# EAGLE board Opto_Isolator_Breakout_Panel_v10 (EAGLE 7.2.0), part 1 of 3
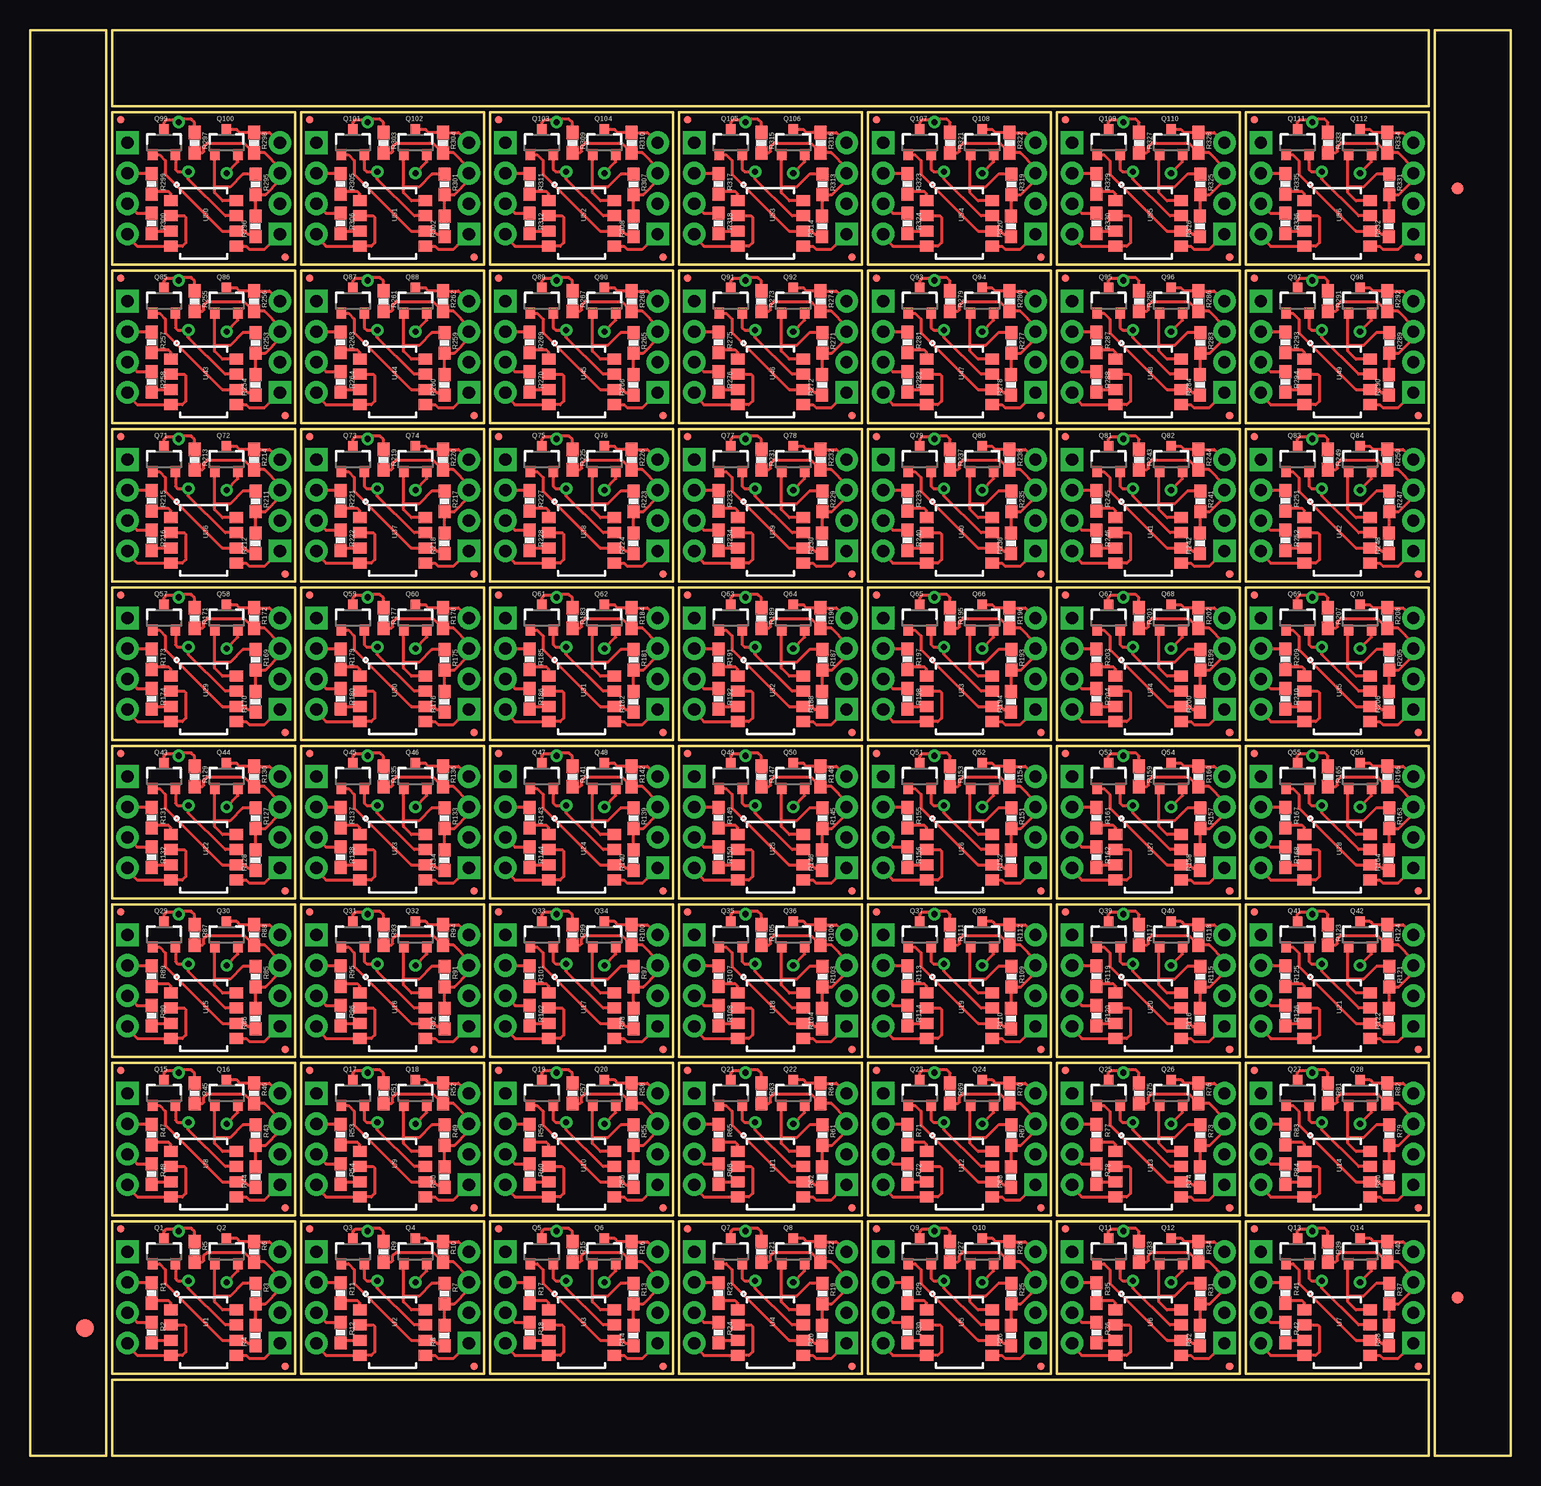
[diagram p0: board, top side]
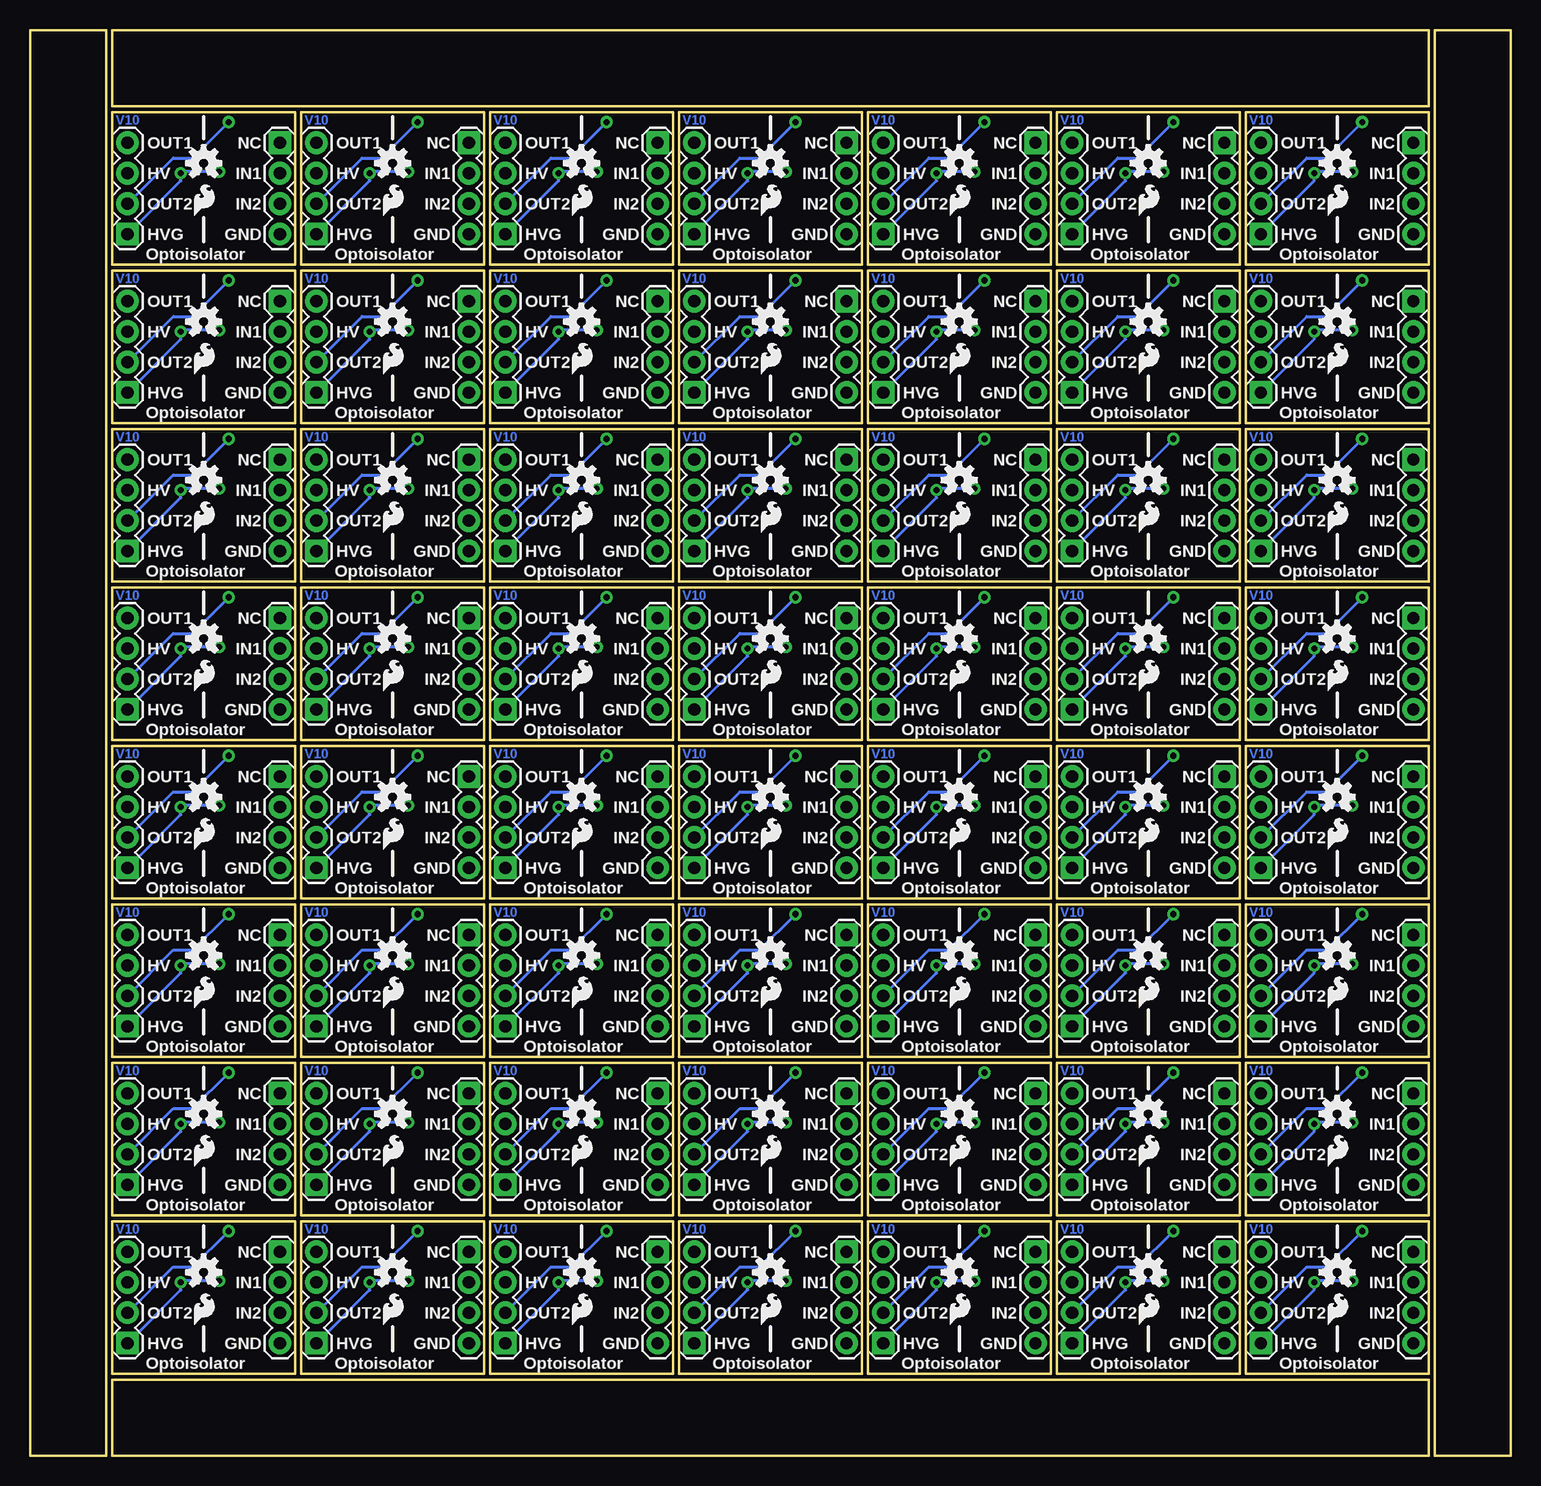
[diagram p1: board, bottom side, seen from below]

Size 123.44 x 118.87 mm. Coordinates in mm from the lower left corner, seen from the top.
Outline: 240 segments
Copper layers (1*16): Top 0.035mm / dielectric 1.5mm / Bottom 0.035mm
Design rules "SparkFun-2-layer": minimum track width 7mil, minimum drill 15mil, track to track 8mil, track to pad 8mil, pad to pad 8mil, via to via 8mil, smd to smd 8mil, copper to edge 8mil, drill to drill 8mil, minimum pad ring 12mil, minimum via ring 10mil, stop-mask expansion 4mil, vias tented up to drill 20mil, thermal gap 10mil

## Footprints (pad centres in the part's own frame; a part is rotated, then mirrored left to right if it is on the bottom)
FIDUCIAL-1.5X3 = smd 1.5 x 1.5: 1 0,0
FIDUCIAL-1X2 = smd 1 x 1: 1 0,0
1X04 = drill 1.016 pad 1.88 square: 1 0,0 | drill 1.016 pad 1.88: 2 2.54,0; 3 5.08,0; 4 7.62,0
SOT23-3 = smd 0.8 x 0.9: 1 -0.95,-1; 2 0.95,-1; 3 0,1.1
0603-RES = smd 1.1 x 1: 1 -0.85,0; 2 0.85,0
SO08-2 = smd 0.914 x 1.143: 1 -1.905,-2.731; 2 -0.635,-2.731; 3 0.635,-2.731; 4 1.905,-2.731; 5 1.905,2.731; 6 0.635,2.731; 7 -0.635,2.731; 8 -1.905,2.731
MICRO-FIDUCIAL = smd 0.635 x 0.635: 1 0,0

## Placement (x,y rotation side)
E$1  [FIDUCIAL-1.5X3]  4.57,10.67 0 top
E$4  [FIDUCIAL-1X2]  119,13.21 0 top
E$5  [FIDUCIAL-1X2]  119,105.66 180 top
JP1  [1X04]  20.83,9.4 90 bottom
JP2  [1X04]  8.13,17.02 270 bottom
JP3  [1X04]  36.58,9.4 90 bottom
JP4  [1X04]  23.88,17.02 270 bottom
JP5  [1X04]  52.32,9.4 90 bottom
JP6  [1X04]  39.62,17.02 270 bottom
JP7  [1X04]  68.07,9.4 90 bottom
JP8  [1X04]  55.37,17.02 270 bottom
JP9  [1X04]  83.82,9.4 90 bottom
JP10  [1X04]  71.12,17.02 270 bottom
JP11  [1X04]  99.57,9.4 90 bottom
JP12  [1X04]  86.87,17.02 270 bottom
JP13  [1X04]  115.32,9.4 90 bottom
JP14  [1X04]  102.62,17.02 270 bottom
JP15  [1X04]  20.83,22.61 90 bottom
JP16  [1X04]  8.13,30.23 270 bottom
JP17  [1X04]  36.58,22.61 90 bottom
JP18  [1X04]  23.88,30.23 270 bottom
JP19  [1X04]  52.32,22.61 90 bottom
JP20  [1X04]  39.62,30.23 270 bottom
JP21  [1X04]  68.07,22.61 90 bottom
JP22  [1X04]  55.37,30.23 270 bottom
JP23  [1X04]  83.82,22.61 90 bottom
JP24  [1X04]  71.12,30.23 270 bottom
JP25  [1X04]  99.57,22.61 90 bottom
JP26  [1X04]  86.87,30.23 270 bottom
JP27  [1X04]  115.32,22.61 90 bottom
JP28  [1X04]  102.62,30.23 270 bottom
JP29  [1X04]  20.83,35.81 90 bottom
JP30  [1X04]  8.13,43.43 270 bottom
JP31  [1X04]  36.58,35.81 90 bottom
JP32  [1X04]  23.88,43.43 270 bottom
JP33  [1X04]  52.32,35.81 90 bottom
JP34  [1X04]  39.62,43.43 270 bottom
JP35  [1X04]  68.07,35.81 90 bottom
JP36  [1X04]  55.37,43.43 270 bottom
JP37  [1X04]  83.82,35.81 90 bottom
JP38  [1X04]  71.12,43.43 270 bottom
JP39  [1X04]  99.57,35.81 90 bottom
JP40  [1X04]  86.87,43.43 270 bottom
JP41  [1X04]  115.32,35.81 90 bottom
JP42  [1X04]  102.62,43.43 270 bottom
JP43  [1X04]  20.83,49.02 90 bottom
JP44  [1X04]  8.13,56.64 270 bottom
JP45  [1X04]  36.58,49.02 90 bottom
JP46  [1X04]  23.88,56.64 270 bottom
JP47  [1X04]  52.32,49.02 90 bottom
JP48  [1X04]  39.62,56.64 270 bottom
JP49  [1X04]  68.07,49.02 90 bottom
JP50  [1X04]  55.37,56.64 270 bottom
JP51  [1X04]  83.82,49.02 90 bottom
JP52  [1X04]  71.12,56.64 270 bottom
JP53  [1X04]  99.57,49.02 90 bottom
JP54  [1X04]  86.87,56.64 270 bottom
JP55  [1X04]  115.32,49.02 90 bottom
JP56  [1X04]  102.62,56.64 270 bottom
JP57  [1X04]  20.83,62.23 90 bottom
JP58  [1X04]  8.13,69.85 270 bottom
JP59  [1X04]  36.58,62.23 90 bottom
JP60  [1X04]  23.88,69.85 270 bottom
JP61  [1X04]  52.32,62.23 90 bottom
JP62  [1X04]  39.62,69.85 270 bottom
JP63  [1X04]  68.07,62.23 90 bottom
JP64  [1X04]  55.37,69.85 270 bottom
JP65  [1X04]  83.82,62.23 90 bottom
JP66  [1X04]  71.12,69.85 270 bottom
JP67  [1X04]  99.57,62.23 90 bottom
JP68  [1X04]  86.87,69.85 270 bottom
JP69  [1X04]  115.32,62.23 90 bottom
JP70  [1X04]  102.62,69.85 270 bottom
JP71  [1X04]  20.83,75.44 90 bottom
JP72  [1X04]  8.13,83.06 270 bottom
JP73  [1X04]  36.58,75.44 90 bottom
JP74  [1X04]  23.88,83.06 270 bottom
JP75  [1X04]  52.32,75.44 90 bottom
JP76  [1X04]  39.62,83.06 270 bottom
JP77  [1X04]  68.07,75.44 90 bottom
JP78  [1X04]  55.37,83.06 270 bottom
JP79  [1X04]  83.82,75.44 90 bottom
JP80  [1X04]  71.12,83.06 270 bottom
JP81  [1X04]  99.57,75.44 90 bottom
JP82  [1X04]  86.87,83.06 270 bottom
JP83  [1X04]  115.32,75.44 90 bottom
JP84  [1X04]  102.62,83.06 270 bottom
JP85  [1X04]  20.83,88.65 90 bottom
JP86  [1X04]  8.13,96.27 270 bottom
JP87  [1X04]  36.58,88.65 90 bottom
JP88  [1X04]  23.88,96.27 270 bottom
JP89  [1X04]  52.32,88.65 90 bottom
JP90  [1X04]  39.62,96.27 270 bottom
JP91  [1X04]  68.07,88.65 90 bottom
JP92  [1X04]  55.37,96.27 270 bottom
JP93  [1X04]  83.82,88.65 90 bottom
JP94  [1X04]  71.12,96.27 270 bottom
JP95  [1X04]  99.57,88.65 90 bottom
JP96  [1X04]  86.87,96.27 270 bottom
JP97  [1X04]  115.32,88.65 90 bottom
JP98  [1X04]  102.62,96.27 270 bottom
JP99  [1X04]  20.83,101.85 90 bottom
JP100  [1X04]  8.13,109.47 270 bottom
JP101  [1X04]  36.58,101.85 90 bottom
JP102  [1X04]  23.88,109.47 270 bottom
JP103  [1X04]  52.32,101.85 90 bottom
JP104  [1X04]  39.62,109.47 270 bottom
JP105  [1X04]  68.07,101.85 90 bottom
JP106  [1X04]  55.37,109.47 270 bottom
JP107  [1X04]  83.82,101.85 90 bottom
JP108  [1X04]  71.12,109.47 270 bottom
JP109  [1X04]  99.57,101.85 90 bottom
JP110  [1X04]  86.87,109.47 270 bottom
JP111  [1X04]  115.32,101.85 90 bottom
JP112  [1X04]  102.62,109.47 270 bottom
LOGO1  OSHW-LOGOS  [OSHW-LOGO-S]  14.48,15.31 0 bottom
LOGO2  SFE_LOGO_FLAME.1_INCH  [SFE_LOGO_FLAME_.1]  15.57,10.61 0 bottom
LOGO3  SFE_LOGO_FLAME.1_INCH  [SFE_LOGO_FLAME_.1]  31.32,10.61 0 bottom
LOGO4  OSHW-LOGOS  [OSHW-LOGO-S]  30.23,15.31 0 bottom
LOGO5  SFE_LOGO_FLAME.1_INCH  [SFE_LOGO_FLAME_.1]  47.06,10.61 0 bottom
LOGO6  OSHW-LOGOS  [OSHW-LOGO-S]  45.98,15.31 0 bottom
LOGO7  SFE_LOGO_FLAME.1_INCH  [SFE_LOGO_FLAME_.1]  62.81,10.61 0 bottom
LOGO8  OSHW-LOGOS  [OSHW-LOGO-S]  61.73,15.31 0 bottom
LOGO9  SFE_LOGO_FLAME.1_INCH  [SFE_LOGO_FLAME_.1]  78.56,10.61 0 bottom
LOGO10  OSHW-LOGOS  [OSHW-LOGO-S]  77.47,15.31 0 bottom
LOGO11  SFE_LOGO_FLAME.1_INCH  [SFE_LOGO_FLAME_.1]  94.31,10.61 0 bottom
LOGO12  OSHW-LOGOS  [OSHW-LOGO-S]  93.22,15.31 0 bottom
LOGO13  SFE_LOGO_FLAME.1_INCH  [SFE_LOGO_FLAME_.1]  110.06,10.61 0 bottom
LOGO14  OSHW-LOGOS  [OSHW-LOGO-S]  108.97,15.31 0 bottom
LOGO15  SFE_LOGO_FLAME.1_INCH  [SFE_LOGO_FLAME_.1]  15.57,23.82 0 bottom
LOGO16  OSHW-LOGOS  [OSHW-LOGO-S]  14.48,28.52 0 bottom
LOGO17  SFE_LOGO_FLAME.1_INCH  [SFE_LOGO_FLAME_.1]  31.32,23.82 0 bottom
LOGO18  OSHW-LOGOS  [OSHW-LOGO-S]  30.23,28.52 0 bottom
LOGO19  SFE_LOGO_FLAME.1_INCH  [SFE_LOGO_FLAME_.1]  47.06,23.82 0 bottom
LOGO20  OSHW-LOGOS  [OSHW-LOGO-S]  45.98,28.52 0 bottom
LOGO21  SFE_LOGO_FLAME.1_INCH  [SFE_LOGO_FLAME_.1]  62.81,23.82 0 bottom
LOGO22  OSHW-LOGOS  [OSHW-LOGO-S]  61.73,28.52 0 bottom
LOGO23  SFE_LOGO_FLAME.1_INCH  [SFE_LOGO_FLAME_.1]  78.56,23.82 0 bottom
LOGO24  OSHW-LOGOS  [OSHW-LOGO-S]  77.47,28.52 0 bottom
LOGO25  SFE_LOGO_FLAME.1_INCH  [SFE_LOGO_FLAME_.1]  94.31,23.82 0 bottom
LOGO26  OSHW-LOGOS  [OSHW-LOGO-S]  93.22,28.52 0 bottom
LOGO27  SFE_LOGO_FLAME.1_INCH  [SFE_LOGO_FLAME_.1]  110.06,23.82 0 bottom
LOGO28  OSHW-LOGOS  [OSHW-LOGO-S]  108.97,28.52 0 bottom
LOGO29  SFE_LOGO_FLAME.1_INCH  [SFE_LOGO_FLAME_.1]  15.57,37.02 0 bottom
LOGO30  OSHW-LOGOS  [OSHW-LOGO-S]  14.48,41.73 0 bottom
LOGO31  SFE_LOGO_FLAME.1_INCH  [SFE_LOGO_FLAME_.1]  31.32,37.02 0 bottom
LOGO32  OSHW-LOGOS  [OSHW-LOGO-S]  30.23,41.73 0 bottom
LOGO33  SFE_LOGO_FLAME.1_INCH  [SFE_LOGO_FLAME_.1]  47.06,37.02 0 bottom
LOGO34  OSHW-LOGOS  [OSHW-LOGO-S]  45.98,41.73 0 bottom
LOGO35  SFE_LOGO_FLAME.1_INCH  [SFE_LOGO_FLAME_.1]  62.81,37.02 0 bottom
LOGO36  OSHW-LOGOS  [OSHW-LOGO-S]  61.73,41.73 0 bottom
LOGO37  SFE_LOGO_FLAME.1_INCH  [SFE_LOGO_FLAME_.1]  78.56,37.02 0 bottom
LOGO38  OSHW-LOGOS  [OSHW-LOGO-S]  77.47,41.73 0 bottom
LOGO39  SFE_LOGO_FLAME.1_INCH  [SFE_LOGO_FLAME_.1]  94.31,37.02 0 bottom
LOGO40  OSHW-LOGOS  [OSHW-LOGO-S]  93.22,41.73 0 bottom
LOGO41  SFE_LOGO_FLAME.1_INCH  [SFE_LOGO_FLAME_.1]  110.06,37.02 0 bottom
LOGO42  OSHW-LOGOS  [OSHW-LOGO-S]  108.97,41.73 0 bottom
LOGO43  SFE_LOGO_FLAME.1_INCH  [SFE_LOGO_FLAME_.1]  15.57,50.23 0 bottom
LOGO44  OSHW-LOGOS  [OSHW-LOGO-S]  14.48,54.93 0 bottom
LOGO45  SFE_LOGO_FLAME.1_INCH  [SFE_LOGO_FLAME_.1]  31.32,50.23 0 bottom
LOGO46  OSHW-LOGOS  [OSHW-LOGO-S]  30.23,54.93 0 bottom
LOGO47  SFE_LOGO_FLAME.1_INCH  [SFE_LOGO_FLAME_.1]  47.06,50.23 0 bottom
LOGO48  OSHW-LOGOS  [OSHW-LOGO-S]  45.98,54.93 0 bottom
LOGO49  SFE_LOGO_FLAME.1_INCH  [SFE_LOGO_FLAME_.1]  62.81,50.23 0 bottom
LOGO50  OSHW-LOGOS  [OSHW-LOGO-S]  61.73,54.93 0 bottom
LOGO51  SFE_LOGO_FLAME.1_INCH  [SFE_LOGO_FLAME_.1]  78.56,50.23 0 bottom
LOGO52  OSHW-LOGOS  [OSHW-LOGO-S]  77.47,54.93 0 bottom
LOGO53  SFE_LOGO_FLAME.1_INCH  [SFE_LOGO_FLAME_.1]  94.31,50.23 0 bottom
LOGO54  OSHW-LOGOS  [OSHW-LOGO-S]  93.22,54.93 0 bottom
LOGO55  SFE_LOGO_FLAME.1_INCH  [SFE_LOGO_FLAME_.1]  110.06,50.23 0 bottom
LOGO56  OSHW-LOGOS  [OSHW-LOGO-S]  108.97,54.93 0 bottom
LOGO57  SFE_LOGO_FLAME.1_INCH  [SFE_LOGO_FLAME_.1]  15.57,63.44 0 bottom
LOGO58  OSHW-LOGOS  [OSHW-LOGO-S]  14.48,68.14 0 bottom
LOGO59  SFE_LOGO_FLAME.1_INCH  [SFE_LOGO_FLAME_.1]  31.32,63.44 0 bottom
LOGO60  OSHW-LOGOS  [OSHW-LOGO-S]  30.23,68.14 0 bottom
LOGO61  SFE_LOGO_FLAME.1_INCH  [SFE_LOGO_FLAME_.1]  47.06,63.44 0 bottom
LOGO62  OSHW-LOGOS  [OSHW-LOGO-S]  45.98,68.14 0 bottom
LOGO63  SFE_LOGO_FLAME.1_INCH  [SFE_LOGO_FLAME_.1]  62.81,63.44 0 bottom
LOGO64  OSHW-LOGOS  [OSHW-LOGO-S]  61.73,68.14 0 bottom
LOGO65  SFE_LOGO_FLAME.1_INCH  [SFE_LOGO_FLAME_.1]  78.56,63.44 0 bottom
LOGO66  OSHW-LOGOS  [OSHW-LOGO-S]  77.47,68.14 0 bottom
LOGO67  SFE_LOGO_FLAME.1_INCH  [SFE_LOGO_FLAME_.1]  94.31,63.44 0 bottom
LOGO68  OSHW-LOGOS  [OSHW-LOGO-S]  93.22,68.14 0 bottom
LOGO69  SFE_LOGO_FLAME.1_INCH  [SFE_LOGO_FLAME_.1]  110.06,63.44 0 bottom
LOGO70  OSHW-LOGOS  [OSHW-LOGO-S]  108.97,68.14 0 bottom
LOGO71  SFE_LOGO_FLAME.1_INCH  [SFE_LOGO_FLAME_.1]  15.57,76.65 0 bottom
LOGO72  OSHW-LOGOS  [OSHW-LOGO-S]  14.48,81.35 0 bottom
LOGO73  SFE_LOGO_FLAME.1_INCH  [SFE_LOGO_FLAME_.1]  31.32,76.65 0 bottom
LOGO74  OSHW-LOGOS  [OSHW-LOGO-S]  30.23,81.35 0 bottom
LOGO75  SFE_LOGO_FLAME.1_INCH  [SFE_LOGO_FLAME_.1]  47.06,76.65 0 bottom
LOGO76  OSHW-LOGOS  [OSHW-LOGO-S]  45.98,81.35 0 bottom
LOGO77  SFE_LOGO_FLAME.1_INCH  [SFE_LOGO_FLAME_.1]  62.81,76.65 0 bottom
LOGO78  OSHW-LOGOS  [OSHW-LOGO-S]  61.73,81.35 0 bottom
LOGO79  SFE_LOGO_FLAME.1_INCH  [SFE_LOGO_FLAME_.1]  78.56,76.65 0 bottom
LOGO80  OSHW-LOGOS  [OSHW-LOGO-S]  77.47,81.35 0 bottom
LOGO81  SFE_LOGO_FLAME.1_INCH  [SFE_LOGO_FLAME_.1]  94.31,76.65 0 bottom
LOGO82  OSHW-LOGOS  [OSHW-LOGO-S]  93.22,81.35 0 bottom
LOGO83  SFE_LOGO_FLAME.1_INCH  [SFE_LOGO_FLAME_.1]  110.06,76.65 0 bottom
LOGO84  OSHW-LOGOS  [OSHW-LOGO-S]  108.97,81.35 0 bottom
LOGO85  SFE_LOGO_FLAME.1_INCH  [SFE_LOGO_FLAME_.1]  15.57,89.86 0 bottom
LOGO86  OSHW-LOGOS  [OSHW-LOGO-S]  14.48,94.56 0 bottom
LOGO87  SFE_LOGO_FLAME.1_INCH  [SFE_LOGO_FLAME_.1]  31.32,89.86 0 bottom
LOGO88  OSHW-LOGOS  [OSHW-LOGO-S]  30.23,94.56 0 bottom
LOGO89  SFE_LOGO_FLAME.1_INCH  [SFE_LOGO_FLAME_.1]  47.06,89.86 0 bottom
LOGO90  OSHW-LOGOS  [OSHW-LOGO-S]  45.98,94.56 0 bottom
LOGO91  SFE_LOGO_FLAME.1_INCH  [SFE_LOGO_FLAME_.1]  62.81,89.86 0 bottom
LOGO92  OSHW-LOGOS  [OSHW-LOGO-S]  61.73,94.56 0 bottom
LOGO93  SFE_LOGO_FLAME.1_INCH  [SFE_LOGO_FLAME_.1]  78.56,89.86 0 bottom
LOGO94  OSHW-LOGOS  [OSHW-LOGO-S]  77.47,94.56 0 bottom
LOGO95  SFE_LOGO_FLAME.1_INCH  [SFE_LOGO_FLAME_.1]  94.31,89.86 0 bottom
LOGO96  OSHW-LOGOS  [OSHW-LOGO-S]  93.22,94.56 0 bottom
LOGO97  SFE_LOGO_FLAME.1_INCH  [SFE_LOGO_FLAME_.1]  110.06,89.86 0 bottom
LOGO98  OSHW-LOGOS  [OSHW-LOGO-S]  108.97,94.56 0 bottom
LOGO99  SFE_LOGO_FLAME.1_INCH  [SFE_LOGO_FLAME_.1]  15.57,103.06 0 bottom
LOGO100  OSHW-LOGOS  [OSHW-LOGO-S]  14.48,107.77 0 bottom
LOGO101  SFE_LOGO_FLAME.1_INCH  [SFE_LOGO_FLAME_.1]  31.32,103.06 0 bottom
LOGO102  OSHW-LOGOS  [OSHW-LOGO-S]  30.23,107.77 0 bottom
LOGO103  SFE_LOGO_FLAME.1_INCH  [SFE_LOGO_FLAME_.1]  47.06,103.06 0 bottom
LOGO104  OSHW-LOGOS  [OSHW-LOGO-S]  45.98,107.77 0 bottom
LOGO105  SFE_LOGO_FLAME.1_INCH  [SFE_LOGO_FLAME_.1]  62.81,103.06 0 bottom
LOGO106  OSHW-LOGOS  [OSHW-LOGO-S]  61.73,107.77 0 bottom
LOGO107  SFE_LOGO_FLAME.1_INCH  [SFE_LOGO_FLAME_.1]  78.56,103.06 0 bottom
LOGO108  OSHW-LOGOS  [OSHW-LOGO-S]  77.47,107.77 0 bottom
LOGO109  SFE_LOGO_FLAME.1_INCH  [SFE_LOGO_FLAME_.1]  94.31,103.06 0 bottom
LOGO110  OSHW-LOGOS  [OSHW-LOGO-S]  93.22,107.77 0 bottom
LOGO111  SFE_LOGO_FLAME.1_INCH  [SFE_LOGO_FLAME_.1]  110.06,103.06 0 bottom
LOGO112  OSHW-LOGOS  [OSHW-LOGO-S]  108.97,107.77 0 bottom
Q1  NPN  [SOT23-3]  11.18,17.02 0 top
Q2  NPN  [SOT23-3]  16.38,17.02 0 top
Q3  NPN  [SOT23-3]  26.92,17.02 0 top
Q4  NPN  [SOT23-3]  32.13,17.02 0 top
Q5  NPN  [SOT23-3]  42.67,17.02 0 top
Q6  NPN  [SOT23-3]  47.88,17.02 0 top
Q7  NPN  [SOT23-3]  58.42,17.02 0 top
Q8  NPN  [SOT23-3]  63.63,17.02 0 top
Q9  NPN  [SOT23-3]  74.17,17.02 0 top
Q10  NPN  [SOT23-3]  79.38,17.02 0 top
Q11  NPN  [SOT23-3]  89.92,17.02 0 top
Q12  NPN  [SOT23-3]  95.12,17.02 0 top
Q13  NPN  [SOT23-3]  105.66,17.02 0 top
Q14  NPN  [SOT23-3]  110.87,17.02 0 top
Q15  NPN  [SOT23-3]  11.18,30.23 0 top
Q16  NPN  [SOT23-3]  16.38,30.23 0 top
Q17  NPN  [SOT23-3]  26.92,30.23 0 top
Q18  NPN  [SOT23-3]  32.13,30.23 0 top
Q19  NPN  [SOT23-3]  42.67,30.23 0 top
Q20  NPN  [SOT23-3]  47.88,30.23 0 top
Q21  NPN  [SOT23-3]  58.42,30.23 0 top
Q22  NPN  [SOT23-3]  63.63,30.23 0 top
Q23  NPN  [SOT23-3]  74.17,30.23 0 top
Q24  NPN  [SOT23-3]  79.38,30.23 0 top
Q25  NPN  [SOT23-3]  89.92,30.23 0 top
Q26  NPN  [SOT23-3]  95.12,30.23 0 top
Q27  NPN  [SOT23-3]  105.66,30.23 0 top
Q28  NPN  [SOT23-3]  110.87,30.23 0 top
Q29  NPN  [SOT23-3]  11.18,43.43 0 top
Q30  NPN  [SOT23-3]  16.38,43.43 0 top
Q31  NPN  [SOT23-3]  26.92,43.43 0 top
Q32  NPN  [SOT23-3]  32.13,43.43 0 top
Q33  NPN  [SOT23-3]  42.67,43.43 0 top
Q34  NPN  [SOT23-3]  47.88,43.43 0 top
Q35  NPN  [SOT23-3]  58.42,43.43 0 top
Q36  NPN  [SOT23-3]  63.63,43.43 0 top
Q37  NPN  [SOT23-3]  74.17,43.43 0 top
Q38  NPN  [SOT23-3]  79.38,43.43 0 top
Q39  NPN  [SOT23-3]  89.92,43.43 0 top
Q40  NPN  [SOT23-3]  95.12,43.43 0 top
Q41  NPN  [SOT23-3]  105.66,43.43 0 top
Q42  NPN  [SOT23-3]  110.87,43.43 0 top
Q43  NPN  [SOT23-3]  11.18,56.64 0 top
Q44  NPN  [SOT23-3]  16.38,56.64 0 top
Q45  NPN  [SOT23-3]  26.92,56.64 0 top
Q46  NPN  [SOT23-3]  32.13,56.64 0 top
Q47  NPN  [SOT23-3]  42.67,56.64 0 top
Q48  NPN  [SOT23-3]  47.88,56.64 0 top
Q49  NPN  [SOT23-3]  58.42,56.64 0 top
Q50  NPN  [SOT23-3]  63.63,56.64 0 top
Q51  NPN  [SOT23-3]  74.17,56.64 0 top
Q52  NPN  [SOT23-3]  79.38,56.64 0 top
Q53  NPN  [SOT23-3]  89.92,56.64 0 top
Q54  NPN  [SOT23-3]  95.12,56.64 0 top
Q55  NPN  [SOT23-3]  105.66,56.64 0 top
Q56  NPN  [SOT23-3]  110.87,56.64 0 top
Q57  NPN  [SOT23-3]  11.18,69.85 0 top
Q58  NPN  [SOT23-3]  16.38,69.85 0 top
Q59  NPN  [SOT23-3]  26.92,69.85 0 top
Q60  NPN  [SOT23-3]  32.13,69.85 0 top
Q61  NPN  [SOT23-3]  42.67,69.85 0 top
Q62  NPN  [SOT23-3]  47.88,69.85 0 top
Q63  NPN  [SOT23-3]  58.42,69.85 0 top
Q64  NPN  [SOT23-3]  63.63,69.85 0 top
Q65  NPN  [SOT23-3]  74.17,69.85 0 top
Q66  NPN  [SOT23-3]  79.38,69.85 0 top
Q67  NPN  [SOT23-3]  89.92,69.85 0 top
Q68  NPN  [SOT23-3]  95.12,69.85 0 top
Q69  NPN  [SOT23-3]  105.66,69.85 0 top
Q70  NPN  [SOT23-3]  110.87,69.85 0 top
Q71  NPN  [SOT23-3]  11.18,83.06 0 top
Q72  NPN  [SOT23-3]  16.38,83.06 0 top
Q73  NPN  [SOT23-3]  26.92,83.06 0 top
Q74  NPN  [SOT23-3]  32.13,83.06 0 top
Q75  NPN  [SOT23-3]  42.67,83.06 0 top
Q76  NPN  [SOT23-3]  47.88,83.06 0 top
Q77  NPN  [SOT23-3]  58.42,83.06 0 top
Q78  NPN  [SOT23-3]  63.63,83.06 0 top
Q79  NPN  [SOT23-3]  74.17,83.06 0 top
Q80  NPN  [SOT23-3]  79.38,83.06 0 top
Q81  NPN  [SOT23-3]  89.92,83.06 0 top
Q82  NPN  [SOT23-3]  95.12,83.06 0 top
Q83  NPN  [SOT23-3]  105.66,83.06 0 top
Q84  NPN  [SOT23-3]  110.87,83.06 0 top
Q85  NPN  [SOT23-3]  11.18,96.27 0 top
Q86  NPN  [SOT23-3]  16.38,96.27 0 top
Q87  NPN  [SOT23-3]  26.92,96.27 0 top
Q88  NPN  [SOT23-3]  32.13,96.27 0 top
Q89  NPN  [SOT23-3]  42.67,96.27 0 top
Q90  NPN  [SOT23-3]  47.88,96.27 0 top
Q91  NPN  [SOT23-3]  58.42,96.27 0 top
Q92  NPN  [SOT23-3]  63.63,96.27 0 top
Q93  NPN  [SOT23-3]  74.17,96.27 0 top
Q94  NPN  [SOT23-3]  79.38,96.27 0 top
Q95  NPN  [SOT23-3]  89.92,96.27 0 top
Q96  NPN  [SOT23-3]  95.12,96.27 0 top
Q97  NPN  [SOT23-3]  105.66,96.27 0 top
Q98  NPN  [SOT23-3]  110.87,96.27 0 top
Q99  NPN  [SOT23-3]  11.18,109.47 0 top
Q100  NPN  [SOT23-3]  16.38,109.47 0 top
Q101  NPN  [SOT23-3]  26.92,109.47 0 top
Q102  NPN  [SOT23-3]  32.13,109.47 0 top
Q103  NPN  [SOT23-3]  42.67,109.47 0 top
Q104  NPN  [SOT23-3]  47.88,109.47 0 top
Q105  NPN  [SOT23-3]  58.42,109.47 0 top
Q106  NPN  [SOT23-3]  63.63,109.47 0 top
Q107  NPN  [SOT23-3]  74.17,109.47 0 top
Q108  NPN  [SOT23-3]  79.38,109.47 0 top
Q109  NPN  [SOT23-3]  89.92,109.47 0 top
Q110  NPN  [SOT23-3]  95.12,109.47 0 top
Q111  NPN  [SOT23-3]  105.66,109.47 0 top
Q112  NPN  [SOT23-3]  110.87,109.47 0 top
R1  220  [0603-RES]  10.16,13.59 270 top
R2  220  [0603-RES]  10.16,10.29 270 top
R3  10K  [0603-RES]  18.82,13.54 270 top
R4  10K  [0603-RES]  18.8,10.03 90 top
R5  10K  [0603-RES]  13.72,17.02 270 top
R6  10K  [0603-RES]  18.67,17.02 270 top
R7  10K  [0603-RES]  34.57,13.54 270 top
R8  10K  [0603-RES]  34.54,10.03 90 top
R9  10K  [0603-RES]  29.46,17.02 270 top
R10  10K  [0603-RES]  34.42,17.02 270 top
R11  220  [0603-RES]  25.91,13.59 270 top
R12  220  [0603-RES]  25.91,10.29 270 top
R13  10K  [0603-RES]  50.32,13.54 270 top
R14  10K  [0603-RES]  50.29,10.03 90 top
R15  10K  [0603-RES]  45.21,17.02 270 top
R16  10K  [0603-RES]  50.16,17.02 270 top
R17  220  [0603-RES]  41.66,13.59 270 top
R18  220  [0603-RES]  41.66,10.29 270 top
R19  10K  [0603-RES]  66.07,13.54 270 top
R20  10K  [0603-RES]  66.04,10.03 90 top
R21  10K  [0603-RES]  60.96,17.02 270 top
R22  10K  [0603-RES]  65.91,17.02 270 top
R23  220  [0603-RES]  57.4,13.59 270 top
R24  220  [0603-RES]  57.4,10.29 270 top
R25  10K  [0603-RES]  81.81,13.54 270 top
R26  10K  [0603-RES]  81.79,10.03 90 top
R27  10K  [0603-RES]  76.71,17.02 270 top
R28  10K  [0603-RES]  81.66,17.02 270 top
R29  220  [0603-RES]  73.15,13.59 270 top
R30  220  [0603-RES]  73.15,10.29 270 top
R31  10K  [0603-RES]  97.56,13.54 270 top
R32  10K  [0603-RES]  97.54,10.03 90 top
R33  10K  [0603-RES]  92.46,17.02 270 top
R34  10K  [0603-RES]  97.41,17.02 270 top
R35  220  [0603-RES]  88.9,13.59 270 top
R36  220  [0603-RES]  88.9,10.29 270 top
R37  10K  [0603-RES]  113.31,13.54 270 top
R38  10K  [0603-RES]  113.28,10.03 90 top
R39  10K  [0603-RES]  108.2,17.02 270 top
R40  10K  [0603-RES]  113.16,17.02 270 top
R41  220  [0603-RES]  104.65,13.59 270 top
R42  220  [0603-RES]  104.65,10.29 270 top
R43  10K  [0603-RES]  18.82,26.75 270 top
R44  10K  [0603-RES]  18.8,23.24 90 top
R45  10K  [0603-RES]  13.72,30.23 270 top
R46  10K  [0603-RES]  18.67,30.23 270 top
R47  220  [0603-RES]  10.16,26.8 270 top
R48  220  [0603-RES]  10.16,23.5 270 top
R49  10K  [0603-RES]  34.57,26.75 270 top
R50  10K  [0603-RES]  34.54,23.24 90 top
R51  10K  [0603-RES]  29.46,30.23 270 top
R52  10K  [0603-RES]  34.42,30.23 270 top
R53  220  [0603-RES]  25.91,26.8 270 top
R54  220  [0603-RES]  25.91,23.5 270 top
R55  10K  [0603-RES]  50.32,26.75 270 top
R56  10K  [0603-RES]  50.29,23.24 90 top
R57  10K  [0603-RES]  45.21,30.23 270 top
R58  10K  [0603-RES]  50.16,30.23 270 top
R59  220  [0603-RES]  41.66,26.8 270 top
R60  220  [0603-RES]  41.66,23.5 270 top
R61  10K  [0603-RES]  66.07,26.75 270 top
R62  10K  [0603-RES]  66.04,23.24 90 top
R63  10K  [0603-RES]  60.96,30.23 270 top
R64  10K  [0603-RES]  65.91,30.23 270 top
R65  220  [0603-RES]  57.4,26.8 270 top
R66  220  [0603-RES]  57.4,23.5 270 top
R67  10K  [0603-RES]  81.81,26.75 270 top
R68  10K  [0603-RES]  81.79,23.24 90 top
R69  10K  [0603-RES]  76.71,30.23 270 top
R70  10K  [0603-RES]  81.66,30.23 270 top
R71  220  [0603-RES]  73.15,26.8 270 top
R72  220  [0603-RES]  73.15,23.5 270 top
R73  10K  [0603-RES]  97.56,26.75 270 top
R74  10K  [0603-RES]  97.54,23.24 90 top
R75  10K  [0603-RES]  92.46,30.23 270 top
R76  10K  [0603-RES]  97.41,30.23 270 top
R77  220  [0603-RES]  88.9,26.8 270 top
R78  220  [0603-RES]  88.9,23.5 270 top
R79  10K  [0603-RES]  113.31,26.75 270 top
R80  10K  [0603-RES]  113.28,23.24 90 top
R81  10K  [0603-RES]  108.2,30.23 270 top
R82  10K  [0603-RES]  113.16,30.23 270 top
R83  220  [0603-RES]  104.65,26.8 270 top
R84  220  [0603-RES]  104.65,23.5 270 top
R85  10K  [0603-RES]  18.82,39.95 270 top
R86  10K  [0603-RES]  18.8,36.45 90 top
R87  10K  [0603-RES]  13.72,43.43 270 top
R88  10K  [0603-RES]  18.67,43.43 270 top
R89  220  [0603-RES]  10.16,40.01 270 top
R90  220  [0603-RES]  10.16,36.7 270 top
R91  10K  [0603-RES]  34.57,39.95 270 top
R92  10K  [0603-RES]  34.54,36.45 90 top
R93  10K  [0603-RES]  29.46,43.43 270 top
R94  10K  [0603-RES]  34.42,43.43 270 top
R95  220  [0603-RES]  25.91,40.01 270 top
R96  220  [0603-RES]  25.91,36.7 270 top
R97  10K  [0603-RES]  50.32,39.95 270 top
R98  10K  [0603-RES]  50.29,36.45 90 top
R99  10K  [0603-RES]  45.21,43.43 270 top
R100  10K  [0603-RES]  50.16,43.43 270 top
R101  220  [0603-RES]  41.66,40.01 270 top
R102  220  [0603-RES]  41.66,36.7 270 top
R103  10K  [0603-RES]  66.07,39.95 270 top
R104  10K  [0603-RES]  66.04,36.45 90 top
R105  10K  [0603-RES]  60.96,43.43 270 top
R106  10K  [0603-RES]  65.91,43.43 270 top
R107  220  [0603-RES]  57.4,40.01 270 top
R108  220  [0603-RES]  57.4,36.7 270 top
R109  10K  [0603-RES]  81.81,39.95 270 top
R110  10K  [0603-RES]  81.79,36.45 90 top
R111  10K  [0603-RES]  76.71,43.43 270 top
R112  10K  [0603-RES]  81.66,43.43 270 top
R113  220  [0603-RES]  73.15,40.01 270 top
R114  220  [0603-RES]  73.15,36.7 270 top
R115  10K  [0603-RES]  97.56,39.95 270 top
R116  10K  [0603-RES]  97.54,36.45 90 top
R117  10K  [0603-RES]  92.46,43.43 270 top
R118  10K  [0603-RES]  97.41,43.43 270 top
R119  220  [0603-RES]  88.9,40.01 270 top
R120  220  [0603-RES]  88.9,36.7 270 top
R121  10K  [0603-RES]  113.31,39.95 270 top
R122  10K  [0603-RES]  113.28,36.45 90 top
R123  10K  [0603-RES]  108.2,43.43 270 top
R124  10K  [0603-RES]  113.16,43.43 270 top
R125  220  [0603-RES]  104.65,40.01 270 top
R126  220  [0603-RES]  104.65,36.7 270 top
R127  10K  [0603-RES]  18.82,53.16 270 top
R128  10K  [0603-RES]  18.8,49.66 90 top
R129  10K  [0603-RES]  13.72,56.64 270 top
R130  10K  [0603-RES]  18.67,56.64 270 top
R131  220  [0603-RES]  10.16,53.21 270 top
R132  220  [0603-RES]  10.16,49.91 270 top
R133  10K  [0603-RES]  34.57,53.16 270 top
R134  10K  [0603-RES]  34.54,49.66 90 top
R135  10K  [0603-RES]  29.46,56.64 270 top
R136  10K  [0603-RES]  34.42,56.64 270 top
R137  220  [0603-RES]  25.91,53.21 270 top
R138  220  [0603-RES]  25.91,49.91 270 top
R139  10K  [0603-RES]  50.32,53.16 270 top
R140  10K  [0603-RES]  50.29,49.66 90 top
R141  10K  [0603-RES]  45.21,56.64 270 top
R142  10K  [0603-RES]  50.16,56.64 270 top
R143  220  [0603-RES]  41.66,53.21 270 top
R144  220  [0603-RES]  41.66,49.91 270 top
R145  10K  [0603-RES]  66.07,53.16 270 top
R146  10K  [0603-RES]  66.04,49.66 90 top
R147  10K  [0603-RES]  60.96,56.64 270 top
R148  10K  [0603-RES]  65.91,56.64 270 top
R149  220  [0603-RES]  57.4,53.21 270 top
R150  220  [0603-RES]  57.4,49.91 270 top
R151  10K  [0603-RES]  81.81,53.16 270 top
R152  10K  [0603-RES]  81.79,49.66 90 top
R153  10K  [0603-RES]  76.71,56.64 270 top
R154  10K  [0603-RES]  81.66,56.64 270 top
R155  220  [0603-RES]  73.15,53.21 270 top
R156  220  [0603-RES]  73.15,49.91 270 top
R157  10K  [0603-RES]  97.56,53.16 270 top
R158  10K  [0603-RES]  97.54,49.66 90 top
R159  10K  [0603-RES]  92.46,56.64 270 top
R160  10K  [0603-RES]  97.41,56.64 270 top
R161  220  [0603-RES]  88.9,53.21 270 top
R162  220  [0603-RES]  88.9,49.91 270 top
R163  10K  [0603-RES]  113.31,53.16 270 top
R164  10K  [0603-RES]  113.28,49.66 90 top
R165  10K  [0603-RES]  108.2,56.64 270 top
R166  10K  [0603-RES]  113.16,56.64 270 top
R167  220  [0603-RES]  104.65,53.21 270 top
R168  220  [0603-RES]  104.65,49.91 270 top
R169  10K  [0603-RES]  18.82,66.37 270 top
R170  10K  [0603-RES]  18.8,62.87 90 top
R171  10K  [0603-RES]  13.72,69.85 270 top
R172  10K  [0603-RES]  18.67,69.85 270 top
R173  220  [0603-RES]  10.16,66.42 270 top
R174  220  [0603-RES]  10.16,63.12 270 top
R175  10K  [0603-RES]  34.57,66.37 270 top
R176  10K  [0603-RES]  34.54,62.87 90 top
R177  10K  [0603-RES]  29.46,69.85 270 top
R178  10K  [0603-RES]  34.42,69.85 270 top
R179  220  [0603-RES]  25.91,66.42 270 top
R180  220  [0603-RES]  25.91,63.12 270 top
R181  10K  [0603-RES]  50.32,66.37 270 top
R182  10K  [0603-RES]  50.29,62.87 90 top
R183  10K  [0603-RES]  45.21,69.85 270 top
R184  10K  [0603-RES]  50.16,69.85 270 top
R185  220  [0603-RES]  41.66,66.42 270 top
R186  220  [0603-RES]  41.66,63.12 270 top
R187  10K  [0603-RES]  66.07,66.37 270 top
R188  10K  [0603-RES]  66.04,62.87 90 top
R189  10K  [0603-RES]  60.96,69.85 270 top
R190  10K  [0603-RES]  65.91,69.85 270 top
R191  220  [0603-RES]  57.4,66.42 270 top
R192  220  [0603-RES]  57.4,63.12 270 top
R193  10K  [0603-RES]  81.81,66.37 270 top
R194  10K  [0603-RES]  81.79,62.87 90 top
R195  10K  [0603-RES]  76.71,69.85 270 top
R196  10K  [0603-RES]  81.66,69.85 270 top
R197  220  [0603-RES]  73.15,66.42 270 top
R198  220  [0603-RES]  73.15,63.12 270 top
R199  10K  [0603-RES]  97.56,66.37 270 top
R200  10K  [0603-RES]  97.54,62.87 90 top
R201  10K  [0603-RES]  92.46,69.85 270 top
R202  10K  [0603-RES]  97.41,69.85 270 top
R203  220  [0603-RES]  88.9,66.42 270 top
R204  220  [0603-RES]  88.9,63.12 270 top
R205  10K  [0603-RES]  113.31,66.37 270 top
R206  10K  [0603-RES]  113.28,62.87 90 top
R207  10K  [0603-RES]  108.2,69.85 270 top
R208  10K  [0603-RES]  113.16,69.85 270 top
R209  220  [0603-RES]  104.65,66.42 270 top
R210  220  [0603-RES]  104.65,63.12 270 top
R211  10K  [0603-RES]  18.82,79.58 270 top
R212  10K  [0603-RES]  18.8,76.07 90 top
R213  10K  [0603-RES]  13.72,83.06 270 top
R214  10K  [0603-RES]  18.67,83.06 270 top
R215  220  [0603-RES]  10.16,79.63 270 top
R216  220  [0603-RES]  10.16,76.33 270 top
R217  10K  [0603-RES]  34.57,79.58 270 top
R218  10K  [0603-RES]  34.54,76.07 90 top
R219  10K  [0603-RES]  29.46,83.06 270 top
R220  10K  [0603-RES]  34.42,83.06 270 top
R221  220  [0603-RES]  25.91,79.63 270 top
R222  220  [0603-RES]  25.91,76.33 270 top
R223  10K  [0603-RES]  50.32,79.58 270 top
R224  10K  [0603-RES]  50.29,76.07 90 top
R225  10K  [0603-RES]  45.21,83.06 270 top
R226  10K  [0603-RES]  50.16,83.06 270 top
R227  220  [0603-RES]  41.66,79.63 270 top
R228  220  [0603-RES]  41.66,76.33 270 top
R229  10K  [0603-RES]  66.07,79.58 270 top
R230  10K  [0603-RES]  66.04,76.07 90 top
R231  10K  [0603-RES]  60.96,83.06 270 top
R232  10K  [0603-RES]  65.91,83.06 270 top
R233  220  [0603-RES]  57.4,79.63 270 top
R234  220  [0603-RES]  57.4,76.33 270 top
R235  10K  [0603-RES]  81.81,79.58 270 top
R236  10K  [0603-RES]  81.79,76.07 90 top
R237  10K  [0603-RES]  76.71,83.06 270 top
R238  10K  [0603-RES]  81.66,83.06 270 top
R239  220  [0603-RES]  73.15,79.63 270 top
R240  220  [0603-RES]  73.15,76.33 270 top
R241  10K  [0603-RES]  97.56,79.58 270 top
R242  10K  [0603-RES]  97.54,76.07 90 top
R243  10K  [0603-RES]  92.46,83.06 270 top
R244  10K  [0603-RES]  97.41,83.06 270 top
R245  220  [0603-RES]  88.9,79.63 270 top
R246  220  [0603-RES]  88.9,76.33 270 top
R247  10K  [0603-RES]  113.31,79.58 270 top
R248  10K  [0603-RES]  113.28,76.07 90 top
R249  10K  [0603-RES]  108.2,83.06 270 top
R250  10K  [0603-RES]  113.16,83.06 270 top
R251  220  [0603-RES]  104.65,79.63 270 top
R252  220  [0603-RES]  104.65,76.33 270 top
R253  10K  [0603-RES]  18.82,92.79 270 top
R254  10K  [0603-RES]  18.8,89.28 90 top
R255  10K  [0603-RES]  13.72,96.27 270 top
R256  10K  [0603-RES]  18.67,96.27 270 top
R257  220  [0603-RES]  10.16,92.84 270 top
R258  220  [0603-RES]  10.16,89.53 270 top
R259  10K  [0603-RES]  34.57,92.79 270 top
R260  10K  [0603-RES]  34.54,89.28 90 top
R261  10K  [0603-RES]  29.46,96.27 270 top
R262  10K  [0603-RES]  34.42,96.27 270 top
R263  220  [0603-RES]  25.91,92.84 270 top
R264  220  [0603-RES]  25.91,89.53 270 top
R265  10K  [0603-RES]  50.32,92.79 270 top
R266  10K  [0603-RES]  50.29,89.28 90 top
R267  10K  [0603-RES]  45.21,96.27 270 top
R268  10K  [0603-RES]  50.16,96.27 270 top
R269  220  [0603-RES]  41.66,92.84 270 top
R270  220  [0603-RES]  41.66,89.53 270 top
R271  10K  [0603-RES]  66.07,92.79 270 top
R272  10K  [0603-RES]  66.04,89.28 90 top
R273  10K  [0603-RES]  60.96,96.27 270 top
R274  10K  [0603-RES]  65.91,96.27 270 top
R275  220  [0603-RES]  57.4,92.84 270 top
R276  220  [0603-RES]  57.4,89.53 270 top
R277  10K  [0603-RES]  81.81,92.79 270 top
R278  10K  [0603-RES]  81.79,89.28 90 top
R279  10K  [0603-RES]  76.71,96.27 270 top
R280  10K  [0603-RES]  81.66,96.27 270 top
R281  220  [0603-RES]  73.15,92.84 270 top
R282  220  [0603-RES]  73.15,89.53 270 top
R283  10K  [0603-RES]  97.56,92.79 270 top
R284  10K  [0603-RES]  97.54,89.28 90 top
R285  10K  [0603-RES]  92.46,96.27 270 top
R286  10K  [0603-RES]  97.41,96.27 270 top
R287  220  [0603-RES]  88.9,92.84 270 top
R288  220  [0603-RES]  88.9,89.53 270 top
R289  10K  [0603-RES]  113.31,92.79 270 top
R290  10K  [0603-RES]  113.28,89.28 90 top
R291  10K  [0603-RES]  108.2,96.27 270 top
R292  10K  [0603-RES]  113.16,96.27 270 top
R293  220  [0603-RES]  104.65,92.84 270 top
R294  220  [0603-RES]  104.65,89.53 270 top
R295  10K  [0603-RES]  18.82,105.99 270 top
R296  10K  [0603-RES]  18.8,102.49 90 top
R297  10K  [0603-RES]  13.72,109.47 270 top
R298  10K  [0603-RES]  18.67,109.47 270 top
R299  220  [0603-RES]  10.16,106.05 270 top
R300  220  [0603-RES]  10.16,102.74 270 top
R301  10K  [0603-RES]  34.57,105.99 270 top
R302  10K  [0603-RES]  34.54,102.49 90 top
R303  10K  [0603-RES]  29.46,109.47 270 top
R304  10K  [0603-RES]  34.42,109.47 270 top
R305  220  [0603-RES]  25.91,106.05 270 top
R306  220  [0603-RES]  25.91,102.74 270 top
R307  10K  [0603-RES]  50.32,105.99 270 top
R308  10K  [0603-RES]  50.29,102.49 90 top
R309  10K  [0603-RES]  45.21,109.47 270 top
R310  10K  [0603-RES]  50.16,109.47 270 top
R311  220  [0603-RES]  41.66,106.05 270 top
R312  220  [0603-RES]  41.66,102.74 270 top
R313  10K  [0603-RES]  66.07,105.99 270 top
R314  10K  [0603-RES]  66.04,102.49 90 top
R315  10K  [0603-RES]  60.96,109.47 270 top
R316  10K  [0603-RES]  65.91,109.47 270 top
R317  220  [0603-RES]  57.4,106.05 270 top
R318  220  [0603-RES]  57.4,102.74 270 top
R319  10K  [0603-RES]  81.81,105.99 270 top
R320  10K  [0603-RES]  81.79,102.49 90 top
R321  10K  [0603-RES]  76.71,109.47 270 top
R322  10K  [0603-RES]  81.66,109.47 270 top
R323  220  [0603-RES]  73.15,106.05 270 top
R324  220  [0603-RES]  73.15,102.74 270 top
R325  10K  [0603-RES]  97.56,105.99 270 top
R326  10K  [0603-RES]  97.54,102.49 90 top
R327  10K  [0603-RES]  92.46,109.47 270 top
R328  10K  [0603-RES]  97.41,109.47 270 top
R329  220  [0603-RES]  88.9,106.05 270 top
R330  220  [0603-RES]  88.9,102.74 270 top
R331  10K  [0603-RES]  113.31,105.99 270 top
R332  10K  [0603-RES]  113.28,102.49 90 top
R333  10K  [0603-RES]  108.2,109.47 270 top
R334  10K  [0603-RES]  113.16,109.47 270 top
R335  220  [0603-RES]  104.65,106.05 270 top
R336  220  [0603-RES]  104.65,102.74 270 top
U1  OPTOISOLATOR-2SOIC8  [SO08-2]  14.48,10.29 270 top
U2  OPTOISOLATOR-2SOIC8  [SO08-2]  30.23,10.29 270 top
U3  OPTOISOLATOR-2SOIC8  [SO08-2]  45.97,10.29 270 top
U4  OPTOISOLATOR-2SOIC8  [SO08-2]  61.72,10.29 270 top
U5  OPTOISOLATOR-2SOIC8  [SO08-2]  77.47,10.29 270 top
U6  OPTOISOLATOR-2SOIC8  [SO08-2]  93.22,10.29 270 top
U7  OPTOISOLATOR-2SOIC8  [SO08-2]  108.97,10.29 270 top
U8  OPTOISOLATOR-2SOIC8  [SO08-2]  14.48,23.5 270 top
U9  OPTOISOLATOR-2SOIC8  [SO08-2]  30.23,23.5 270 top
U10  OPTOISOLATOR-2SOIC8  [SO08-2]  45.97,23.5 270 top
U11  OPTOISOLATOR-2SOIC8  [SO08-2]  61.72,23.5 270 top
U12  OPTOISOLATOR-2SOIC8  [SO08-2]  77.47,23.5 270 top
U13  OPTOISOLATOR-2SOIC8  [SO08-2]  93.22,23.5 270 top
U14  OPTOISOLATOR-2SOIC8  [SO08-2]  108.97,23.5 270 top
U15  OPTOISOLATOR-2SOIC8  [SO08-2]  14.48,36.7 270 top
U16  OPTOISOLATOR-2SOIC8  [SO08-2]  30.23,36.7 270 top
U17  OPTOISOLATOR-2SOIC8  [SO08-2]  45.97,36.7 270 top
U18  OPTOISOLATOR-2SOIC8  [SO08-2]  61.72,36.7 270 top
U19  OPTOISOLATOR-2SOIC8  [SO08-2]  77.47,36.7 270 top
U20  OPTOISOLATOR-2SOIC8  [SO08-2]  93.22,36.7 270 top
U21  OPTOISOLATOR-2SOIC8  [SO08-2]  108.97,36.7 270 top
U22  OPTOISOLATOR-2SOIC8  [SO08-2]  14.48,49.91 270 top
U23  OPTOISOLATOR-2SOIC8  [SO08-2]  30.23,49.91 270 top
U24  OPTOISOLATOR-2SOIC8  [SO08-2]  45.97,49.91 270 top
U25  OPTOISOLATOR-2SOIC8  [SO08-2]  61.72,49.91 270 top
U26  OPTOISOLATOR-2SOIC8  [SO08-2]  77.47,49.91 270 top
U27  OPTOISOLATOR-2SOIC8  [SO08-2]  93.22,49.91 270 top
U28  OPTOISOLATOR-2SOIC8  [SO08-2]  108.97,49.91 270 top
U29  OPTOISOLATOR-2SOIC8  [SO08-2]  14.48,63.12 270 top
U30  OPTOISOLATOR-2SOIC8  [SO08-2]  30.23,63.12 270 top
U31  OPTOISOLATOR-2SOIC8  [SO08-2]  45.97,63.12 270 top
U32  OPTOISOLATOR-2SOIC8  [SO08-2]  61.72,63.12 270 top
U33  OPTOISOLATOR-2SOIC8  [SO08-2]  77.47,63.12 270 top
U34  OPTOISOLATOR-2SOIC8  [SO08-2]  93.22,63.12 270 top
U35  OPTOISOLATOR-2SOIC8  [SO08-2]  108.97,63.12 270 top
U36  OPTOISOLATOR-2SOIC8  [SO08-2]  14.48,76.33 270 top
U37  OPTOISOLATOR-2SOIC8  [SO08-2]  30.23,76.33 270 top
U38  OPTOISOLATOR-2SOIC8  [SO08-2]  45.97,76.33 270 top
U39  OPTOISOLATOR-2SOIC8  [SO08-2]  61.72,76.33 270 top
U40  OPTOISOLATOR-2SOIC8  [SO08-2]  77.47,76.33 270 top
U41  OPTOISOLATOR-2SOIC8  [SO08-2]  93.22,76.33 270 top
U42  OPTOISOLATOR-2SOIC8  [SO08-2]  108.97,76.33 270 top
U43  OPTOISOLATOR-2SOIC8  [SO08-2]  14.48,89.53 270 top
U44  OPTOISOLATOR-2SOIC8  [SO08-2]  30.23,89.53 270 top
U45  OPTOISOLATOR-2SOIC8  [SO08-2]  45.97,89.53 270 top
U46  OPTOISOLATOR-2SOIC8  [SO08-2]  61.72,89.53 270 top
U47  OPTOISOLATOR-2SOIC8  [SO08-2]  77.47,89.53 270 top
U48  OPTOISOLATOR-2SOIC8  [SO08-2]  93.22,89.53 270 top
U49  OPTOISOLATOR-2SOIC8  [SO08-2]  108.97,89.53 270 top
U50  OPTOISOLATOR-2SOIC8  [SO08-2]  14.48,102.74 270 top
U51  OPTOISOLATOR-2SOIC8  [SO08-2]  30.23,102.74 270 top
U52  OPTOISOLATOR-2SOIC8  [SO08-2]  45.97,102.74 270 top
U53  OPTOISOLATOR-2SOIC8  [SO08-2]  61.72,102.74 270 top
U54  OPTOISOLATOR-2SOIC8  [SO08-2]  77.47,102.74 270 top
U55  OPTOISOLATOR-2SOIC8  [SO08-2]  93.22,102.74 270 top
U56  OPTOISOLATOR-2SOIC8  [SO08-2]  108.97,102.74 270 top
U$1  FIDUCIALUFIDUCIAL  [MICRO-FIDUCIAL]  23.32,18.92 0 top
U$2  FIDUCIALUFIDUCIAL  [MICRO-FIDUCIAL]  7.57,18.92 0 top
U$3  FIDUCIALUFIDUCIAL  [MICRO-FIDUCIAL]  21.26,7.49 0 top
U$4  FIDUCIALUFIDUCIAL  [MICRO-FIDUCIAL]  37.01,7.49 0 top
U$5  FIDUCIALUFIDUCIAL  [MICRO-FIDUCIAL]  39.07,18.92 0 top
U$6  FIDUCIALUFIDUCIAL  [MICRO-FIDUCIAL]  52.76,7.49 0 top
U$7  FIDUCIALUFIDUCIAL  [MICRO-FIDUCIAL]  54.81,18.92 0 top
U$8  FIDUCIALUFIDUCIAL  [MICRO-FIDUCIAL]  68.5,7.49 0 top
U$9  FIDUCIALUFIDUCIAL  [MICRO-FIDUCIAL]  70.56,18.92 0 top
U$10  FIDUCIALUFIDUCIAL  [MICRO-FIDUCIAL]  84.25,7.49 0 top
U$11  FIDUCIALUFIDUCIAL  [MICRO-FIDUCIAL]  86.31,18.92 0 top
U$12  FIDUCIALUFIDUCIAL  [MICRO-FIDUCIAL]  100,7.49 0 top
U$13  FIDUCIALUFIDUCIAL  [MICRO-FIDUCIAL]  102.06,18.92 0 top
U$14  FIDUCIALUFIDUCIAL  [MICRO-FIDUCIAL]  115.75,7.49 0 top
U$15  FIDUCIALUFIDUCIAL  [MICRO-FIDUCIAL]  7.57,32.13 0 top
U$16  FIDUCIALUFIDUCIAL  [MICRO-FIDUCIAL]  21.26,20.7 0 top
U$17  FIDUCIALUFIDUCIAL  [MICRO-FIDUCIAL]  23.32,32.13 0 top
U$18  FIDUCIALUFIDUCIAL  [MICRO-FIDUCIAL]  37.01,20.7 0 top
U$19  FIDUCIALUFIDUCIAL  [MICRO-FIDUCIAL]  39.07,32.13 0 top
U$20  FIDUCIALUFIDUCIAL  [MICRO-FIDUCIAL]  52.76,20.7 0 top
U$21  FIDUCIALUFIDUCIAL  [MICRO-FIDUCIAL]  54.81,32.13 0 top
U$22  FIDUCIALUFIDUCIAL  [MICRO-FIDUCIAL]  68.5,20.7 0 top
U$23  FIDUCIALUFIDUCIAL  [MICRO-FIDUCIAL]  70.56,32.13 0 top
U$24  FIDUCIALUFIDUCIAL  [MICRO-FIDUCIAL]  84.25,20.7 0 top
U$25  FIDUCIALUFIDUCIAL  [MICRO-FIDUCIAL]  86.31,32.13 0 top
U$26  FIDUCIALUFIDUCIAL  [MICRO-FIDUCIAL]  100,20.7 0 top
U$27  FIDUCIALUFIDUCIAL  [MICRO-FIDUCIAL]  102.06,32.13 0 top
U$28  FIDUCIALUFIDUCIAL  [MICRO-FIDUCIAL]  115.75,20.7 0 top
U$29  FIDUCIALUFIDUCIAL  [MICRO-FIDUCIAL]  7.57,45.34 0 top
U$30  FIDUCIALUFIDUCIAL  [MICRO-FIDUCIAL]  21.26,33.91 0 top
U$31  FIDUCIALUFIDUCIAL  [MICRO-FIDUCIAL]  23.32,45.34 0 top
U$32  FIDUCIALUFIDUCIAL  [MICRO-FIDUCIAL]  37.01,33.91 0 top
U$33  FIDUCIALUFIDUCIAL  [MICRO-FIDUCIAL]  39.07,45.34 0 top
U$34  FIDUCIALUFIDUCIAL  [MICRO-FIDUCIAL]  52.76,33.91 0 top
U$35  FIDUCIALUFIDUCIAL  [MICRO-FIDUCIAL]  54.81,45.34 0 top
U$36  FIDUCIALUFIDUCIAL  [MICRO-FIDUCIAL]  68.5,33.91 0 top
U$37  FIDUCIALUFIDUCIAL  [MICRO-FIDUCIAL]  70.56,45.34 0 top
U$38  FIDUCIALUFIDUCIAL  [MICRO-FIDUCIAL]  84.25,33.91 0 top
U$39  FIDUCIALUFIDUCIAL  [MICRO-FIDUCIAL]  86.31,45.34 0 top
U$40  FIDUCIALUFIDUCIAL  [MICRO-FIDUCIAL]  100,33.91 0 top
U$41  FIDUCIALUFIDUCIAL  [MICRO-FIDUCIAL]  102.06,45.34 0 top
U$42  FIDUCIALUFIDUCIAL  [MICRO-FIDUCIAL]  115.75,33.91 0 top
U$43  FIDUCIALUFIDUCIAL  [MICRO-FIDUCIAL]  7.57,58.55 0 top
U$44  FIDUCIALUFIDUCIAL  [MICRO-FIDUCIAL]  21.26,47.12 0 top
U$45  FIDUCIALUFIDUCIAL  [MICRO-FIDUCIAL]  23.32,58.55 0 top
U$46  FIDUCIALUFIDUCIAL  [MICRO-FIDUCIAL]  37.01,47.12 0 top
U$47  FIDUCIALUFIDUCIAL  [MICRO-FIDUCIAL]  39.07,58.55 0 top
U$48  FIDUCIALUFIDUCIAL  [MICRO-FIDUCIAL]  52.76,47.12 0 top
U$49  FIDUCIALUFIDUCIAL  [MICRO-FIDUCIAL]  54.81,58.55 0 top
U$50  FIDUCIALUFIDUCIAL  [MICRO-FIDUCIAL]  68.5,47.12 0 top
U$51  FIDUCIALUFIDUCIAL  [MICRO-FIDUCIAL]  70.56,58.55 0 top
U$52  FIDUCIALUFIDUCIAL  [MICRO-FIDUCIAL]  84.25,47.12 0 top
U$53  FIDUCIALUFIDUCIAL  [MICRO-FIDUCIAL]  86.31,58.55 0 top
U$54  FIDUCIALUFIDUCIAL  [MICRO-FIDUCIAL]  100,47.12 0 top
U$55  FIDUCIALUFIDUCIAL  [MICRO-FIDUCIAL]  102.06,58.55 0 top
U$56  FIDUCIALUFIDUCIAL  [MICRO-FIDUCIAL]  115.75,47.12 0 top
U$57  FIDUCIALUFIDUCIAL  [MICRO-FIDUCIAL]  7.57,71.75 0 top
U$58  FIDUCIALUFIDUCIAL  [MICRO-FIDUCIAL]  21.26,60.33 0 top
U$59  FIDUCIALUFIDUCIAL  [MICRO-FIDUCIAL]  23.32,71.75 0 top
U$60  FIDUCIALUFIDUCIAL  [MICRO-FIDUCIAL]  37.01,60.33 0 top
U$61  FIDUCIALUFIDUCIAL  [MICRO-FIDUCIAL]  39.07,71.75 0 top
U$62  FIDUCIALUFIDUCIAL  [MICRO-FIDUCIAL]  52.76,60.33 0 top
U$63  FIDUCIALUFIDUCIAL  [MICRO-FIDUCIAL]  54.81,71.75 0 top
U$64  FIDUCIALUFIDUCIAL  [MICRO-FIDUCIAL]  68.5,60.33 0 top
U$65  FIDUCIALUFIDUCIAL  [MICRO-FIDUCIAL]  70.56,71.75 0 top
U$66  FIDUCIALUFIDUCIAL  [MICRO-FIDUCIAL]  84.25,60.33 0 top
U$67  FIDUCIALUFIDUCIAL  [MICRO-FIDUCIAL]  86.31,71.75 0 top
U$68  FIDUCIALUFIDUCIAL  [MICRO-FIDUCIAL]  100,60.33 0 top
U$69  FIDUCIALUFIDUCIAL  [MICRO-FIDUCIAL]  102.06,71.75 0 top
U$70  FIDUCIALUFIDUCIAL  [MICRO-FIDUCIAL]  115.75,60.33 0 top
U$71  FIDUCIALUFIDUCIAL  [MICRO-FIDUCIAL]  7.57,84.96 0 top
U$72  FIDUCIALUFIDUCIAL  [MICRO-FIDUCIAL]  21.26,73.53 0 top
U$73  FIDUCIALUFIDUCIAL  [MICRO-FIDUCIAL]  23.32,84.96 0 top
U$74  FIDUCIALUFIDUCIAL  [MICRO-FIDUCIAL]  37.01,73.53 0 top
U$75  FIDUCIALUFIDUCIAL  [MICRO-FIDUCIAL]  39.07,84.96 0 top
U$76  FIDUCIALUFIDUCIAL  [MICRO-FIDUCIAL]  52.76,73.53 0 top
U$77  FIDUCIALUFIDUCIAL  [MICRO-FIDUCIAL]  54.81,84.96 0 top
U$78  FIDUCIALUFIDUCIAL  [MICRO-FIDUCIAL]  68.5,73.53 0 top
U$79  FIDUCIALUFIDUCIAL  [MICRO-FIDUCIAL]  70.56,84.96 0 top
U$80  FIDUCIALUFIDUCIAL  [MICRO-FIDUCIAL]  84.25,73.53 0 top
U$81  FIDUCIALUFIDUCIAL  [MICRO-FIDUCIAL]  86.31,84.96 0 top
U$82  FIDUCIALUFIDUCIAL  [MICRO-FIDUCIAL]  100,73.53 0 top
U$83  FIDUCIALUFIDUCIAL  [MICRO-FIDUCIAL]  102.06,84.96 0 top
U$84  FIDUCIALUFIDUCIAL  [MICRO-FIDUCIAL]  115.75,73.53 0 top
U$85  FIDUCIALUFIDUCIAL  [MICRO-FIDUCIAL]  7.57,98.17 0 top
U$86  FIDUCIALUFIDUCIAL  [MICRO-FIDUCIAL]  21.26,86.74 0 top
U$87  FIDUCIALUFIDUCIAL  [MICRO-FIDUCIAL]  23.32,98.17 0 top
U$88  FIDUCIALUFIDUCIAL  [MICRO-FIDUCIAL]  37.01,86.74 0 top
U$89  FIDUCIALUFIDUCIAL  [MICRO-FIDUCIAL]  39.07,98.17 0 top
U$90  FIDUCIALUFIDUCIAL  [MICRO-FIDUCIAL]  52.76,86.74 0 top
U$91  FIDUCIALUFIDUCIAL  [MICRO-FIDUCIAL]  54.81,98.17 0 top
U$92  FIDUCIALUFIDUCIAL  [MICRO-FIDUCIAL]  68.5,86.74 0 top
U$93  FIDUCIALUFIDUCIAL  [MICRO-FIDUCIAL]  70.56,98.17 0 top
U$94  FIDUCIALUFIDUCIAL  [MICRO-FIDUCIAL]  84.25,86.74 0 top
U$95  FIDUCIALUFIDUCIAL  [MICRO-FIDUCIAL]  86.31,98.17 0 top
U$96  FIDUCIALUFIDUCIAL  [MICRO-FIDUCIAL]  100,86.74 0 top
U$97  FIDUCIALUFIDUCIAL  [MICRO-FIDUCIAL]  102.06,98.17 0 top
U$98  FIDUCIALUFIDUCIAL  [MICRO-FIDUCIAL]  115.75,86.74 0 top
U$99  FIDUCIALUFIDUCIAL  [MICRO-FIDUCIAL]  7.57,111.38 0 top
U$100  FIDUCIALUFIDUCIAL  [MICRO-FIDUCIAL]  21.26,99.95 0 top
U$101  FIDUCIALUFIDUCIAL  [MICRO-FIDUCIAL]  23.32,111.38 0 top
U$102  FIDUCIALUFIDUCIAL  [MICRO-FIDUCIAL]  37.01,99.95 0 top
U$103  FIDUCIALUFIDUCIAL  [MICRO-FIDUCIAL]  39.07,111.38 0 top
U$104  FIDUCIALUFIDUCIAL  [MICRO-FIDUCIAL]  52.76,99.95 0 top
U$105  FIDUCIALUFIDUCIAL  [MICRO-FIDUCIAL]  54.81,111.38 0 top
U$106  FIDUCIALUFIDUCIAL  [MICRO-FIDUCIAL]  68.5,99.95 0 top
U$107  FIDUCIALUFIDUCIAL  [MICRO-FIDUCIAL]  70.56,111.38 0 top
U$108  FIDUCIALUFIDUCIAL  [MICRO-FIDUCIAL]  84.25,99.95 0 top
U$109  FIDUCIALUFIDUCIAL  [MICRO-FIDUCIAL]  86.31,111.38 0 top
U$110  FIDUCIALUFIDUCIAL  [MICRO-FIDUCIAL]  100,99.95 0 top
U$111  FIDUCIALUFIDUCIAL  [MICRO-FIDUCIAL]  102.06,111.38 0 top
U$112  FIDUCIALUFIDUCIAL  [MICRO-FIDUCIAL]  115.75,99.95 0 top

## Library data of the parts
E$1 = SparkFun-Retired
E$4 E$5 LOGO1-LOGO112 U$1-U$112 = SparkFun-Aesthetics
JP1-JP112 = SparkFun-Connectors
Q1-Q112 = SparkFun-DiscreteSemi; PROD_ID: TRANS-08049; VALUE: MMBT2222A
R1 R2 R11 R12 R17 R18 R23 R24 R29 R30 R35 R36 R41 R42 R47 R48 R53 R54 R59 R60 R65 R66 R71 R72 R77 R78 R83 R84 R89 R90 R95 R96 R101 R102 R107 R108 R113 R114 R119 R120 R125 R126 R131 R132 R137 R138 R143 R144 R149 R150 R155 R156 R161 R162 R167 R168 R173 R174 R179 R180 R185 R186 R191 R192 R197 R198 R203 R204 R209 R210 R215 R216 R221 R222 R227 R228 R233 R234 R239 R240 R245 R246 R251 R252 R257 R258 R263 R264 R269 R270 R275 R276 R281 R282 R287 R288 R293 R294 R299 R300 R305 R306 R311 R312 R317 R318 R323 R324 R329 R330 R335 R336 = SparkFun-Resistors; PROD_ID: RES-07861
R3-R10 R13-R16 R19-R22 R25-R28 R31-R34 R37-R40 R43-R46 R49-R52 R55-R58 R61-R64 R67-R70 R73-R76 R79-R82 R85-R88 R91-R94 R97-R100 R103-R106 R109-R112 R115-R118 R121-R124 R127-R130 R133-R136 R139-R142 R145-R148 R151-R154 R157-R160 R163-R166 R169-R172 R175-R178 R181-R184 R187-R190 R193-R196 R199-R202 R205-R208 R211-R214 R217-R220 R223-R226 R229-R232 R235-R238 R241-R244 R247-R250 R253-R256 R259-R262 R265-R268 R271-R274 R277-R280 R283-R286 R289-R292 R295-R298 R301-R304 R307-R310 R313-R316 R319-R322 R325-R328 R331-R334 = SparkFun-Resistors; PROD_ID: RES-00824
U1-U56 = SparkFun-DiscreteSemi; PROD_ID: IC-09076